# EAGLE board A3-2 (EAGLE 9.7.0)

Size 588.67 x 420.39 mm. Coordinates in mm from the lower left corner, seen from the top.
Outline: 0,0 588.67,0 588.67,420.39 0,420.39 0,0
Copper layers (1*16): Top 0.035mm / dielectric 1.5mm / Bottom 0.035mm
Design rules "default": minimum track width 6mil, minimum drill 0.35mm, track to track 6mil, track to pad 6mil, pad to pad 6mil, via to via 6mil, smd to smd 6mil, copper to edge 40mil, drill to drill 6mil, minimum pad ring 10mil, minimum via ring 8mil, stop-mask expansion 4mil, vias tented up to drill 0mil, thermal gap 10mil

## Footprints (pad centres in the part's own frame; a part is rotated, then mirrored left to right if it is on the bottom)
LEDRD254W60D565H860B = drill 0.981 pad 1.581: 1 -1.27,0; 2 1.27,0
PIEZO = drill 1 pad 1.6: 1 -3.5,0; 2 3.5,0
RESAD1016W63L850D250B = drill 0.83 pad 1.43: 1 -5.08,0; 2 5.08,0
HA-06-SM065 = drill 1 pad 1.676: 1 -2.54,-2.54; 2 0,2.54; 3 2.54,-2.54
SWITCH-MOMENTARY-PTH-6.5MM = drill 1.016 pad 1.88: 1 -3.251,2.261; 2 3.251,2.261; 3 -3.251,-2.261; 4 3.251,-2.261
SG90 = drill 1.016 long: 1 -2.54,0; 2 0,0; 3 2.54,0
SW-200D = drill 0.85 pad 1.45: 1 -7.15,0; 2 7.15,0
ARDUINO-UNO-R3-SHIELD = drill 1.016 pad 1.88: 3.3V 24.13,-2.54; 5V 24.13,0; A0 24.13,12.7; A1 24.13,15.24; A2 24.13,17.78; A3 24.13,20.32; A4 24.13,22.86; A5 24.13,25.4; AREF -24.13,-13.97; D2 -24.13,20.32; D3 -24.13,17.78; D4 -24.13,15.24; D5 -24.13,12.7; D6 -24.13,10.16; D7 -24.13,7.62; D8 -24.13,3.81; D9 -24.13,1.27; D10 -24.13,-1.27; D11 -24.13,-3.81; D12 -24.13,-6.35; D13 -24.13,-8.89; GND@0 24.13,2.54; GND@1 24.13,5.08; GND@2 -24.13,-11.43; IOREF 24.13,-7.62; NC 24.13,-10.16; RES 24.13,-5.08; RX -24.13,25.4; SCL -24.13,-19.05; SDA -24.13,-16.51; TX -24.13,22.86; VIN 24.13,7.62

## Placement (x,y rotation side)
D1  RED  [LEDRD254W60D565H860B]  365.63,367.23 180 top
D2  RED  [LEDRD254W60D565H860B]  392.5,46.65 180 top
D3  RED  [LEDRD254W60D565H860B]  570.91,137.9 180 top
D4  RED  [LEDRD254W60D565H860B]  581.07,137.9 180 top
PIEZO1  PIEZO  [PIEZO]  97.62,71 0 top
R1  10k  [RESAD1016W63L850D250B]  102.94,196.18 90 top
R2  220  [RESAD1016W63L850D250B]  86.23,52.76 0 top
R3  1k  [RESAD1016W63L850D250B]  379.6,351.99 90 top
R4  1k  [RESAD1016W63L850D250B]  393.77,36.49 90 top
R5  1k  [RESAD1016W63L850D250B]  572.18,127.74 90 top
R6  1k  [RESAD1016W63L850D250B]  582.34,127.74 90 top
RPOT1  250k  [HA-06-SM065]  363.87,210.44 0 top
RPOT2  250k  [HA-06-SM065]  363.29,23.79 0 top
RPOT3  250k  [HA-06-SM065]  541.7,115.04 0 top
S1  SWITCH_MOMENTARY  [SWITCH-MOMENTARY-PTH-6.5MM]  100.4,212.69 90 top
SERVO1  SERVOSG90  [SG90]  171.43,345.31 180 top
SERVO2  SERVOSG90  [SG90]  169.6,190.19 180 top
TILT1  TILT  [SW-200D]  393.25,390.28 0 top
U1  ARDUINO-UNO-R3-SHIELD  [ARDUINO-UNO-R3-SHIELD]  34.83,372.5 180 top
U2  ARDUINO-UNO-R3-SHIELD  [ARDUINO-UNO-R3-SHIELD]  34.51,216.99 180 top
U3  ARDUINO-UNO-R3-SHIELD  [ARDUINO-UNO-R3-SHIELD]  29.84,34.52 180 top
U4  ARDUINO-UNO-R3-SHIELD  [ARDUINO-UNO-R3-SHIELD]  313,369.61 180 top
U5  ARDUINO-UNO-R3-SHIELD  [ARDUINO-UNO-R3-SHIELD]  310.83,223.51 180 top
U6  ARDUINO-UNO-R3-SHIELD  [ARDUINO-UNO-R3-SHIELD]  310.25,36.86 180 top
U7  ARDUINO-UNO-R3-SHIELD  [ARDUINO-UNO-R3-SHIELD]  488.66,128.11 180 top

## Library data of the parts
D1-D4 = Tinkercad; CATEGORY: Opto-Electronic; SUB-CATEGORY: LED; VALUE: LED_RED
PIEZO1 R1-R6 RPOT1-RPOT3 S1 SERVO1 SERVO2 TILT1 U1-U7 = Tinkercad

## Nets
D2_A: D2.1 R4.2
D3_A: D3.1 R5.2
D4_A: D4.1 R6.2
PIEZO1_1: PIEZO1.1 R2.2
TILT1_1: D1.1 TILT1.1
TILT1_2: R3.2 TILT1.2
U1_5V: SERVO1.2 U1.5V
U1_D11: SERVO1.3 U1.D11
U1_GND: SERVO1.1 U1.GND@0 U1.GND@1 U1.GND@2
U2_5V: S1.1 S1.2 SERVO2.2 U2.5V
U2_D11: SERVO2.3 U2.D11
U2_D12: R1.2 S1.3 S1.4 U2.D12
U2_GND: R1.1 SERVO2.1 U2.GND@0 U2.GND@1 U2.GND@2
U3_D12: R2.1 U3.D12
U3_GND: PIEZO1.2 U3.GND@0 U3.GND@1 U3.GND@2
U4_3.3V: R3.1 U4.3.3V
U4_GND: D1.2 U4.GND@0 U4.GND@1 U4.GND@2
U5_5V: RPOT1.3 U5.5V
U5_A0: RPOT1.2 U5.A0
U5_GND: RPOT1.1 U5.GND@0 U5.GND@1 U5.GND@2
U6_5V: RPOT2.3 U6.5V
U6_A0: RPOT2.2 U6.A0
U6_D13: R4.1 U6.D13
U6_GND: D2.2 RPOT2.1 U6.GND@0 U6.GND@1 U6.GND@2
U7_5V: RPOT3.3 U7.5V
U7_A0: RPOT3.2 U7.A0
U7_D12: R6.1 U7.D12
U7_D13: R5.1 U7.D13
U7_GND: D3.2 D4.2 RPOT3.1 U7.GND@0 U7.GND@1 U7.GND@2

## Tracks (layer width: path | path; a pad name or v marks a point on that pad's centre or on a via)
D2_A  (1 unrouted)
D3_A  (1 unrouted)
D4_A  (1 unrouted)
PIEZO1_1  (1 unrouted)
TILT1_1  (1 unrouted)
TILT1_2  (1 unrouted)
U1_5V  (1 unrouted)
U1_D11  (1 unrouted)
U1_GND  (3 unrouted)
U2_5V  (3 unrouted)
U2_D11  (1 unrouted)
U2_D12  (3 unrouted)
U2_GND  (4 unrouted)
U3_D12  (1 unrouted)
U3_GND  (3 unrouted)
U4_3.3V  (1 unrouted)
U4_GND  (3 unrouted)
U5_5V  (1 unrouted)
U5_A0  (1 unrouted)
U5_GND  (3 unrouted)
U6_5V  (1 unrouted)
U6_A0  (1 unrouted)
U6_D13  (1 unrouted)
U6_GND  (4 unrouted)
U7_5V  (1 unrouted)
U7_A0  (1 unrouted)
U7_D12  (1 unrouted)
U7_D13  (1 unrouted)
U7_GND  (5 unrouted)